# Altium PCB QC3.0 Decoy-PcbDoc.PcbDoc
Units mil, origin at the board's own origin, x right, y up, seen from the top; angles counter-clockwise.
Board outline 1901.57 x 590.55 mil, 2 copper layers (Top Layer, Bottom Layer), stack 38.57 mil thick; 42 components, 37 nets, 161 pads, 85 vias.
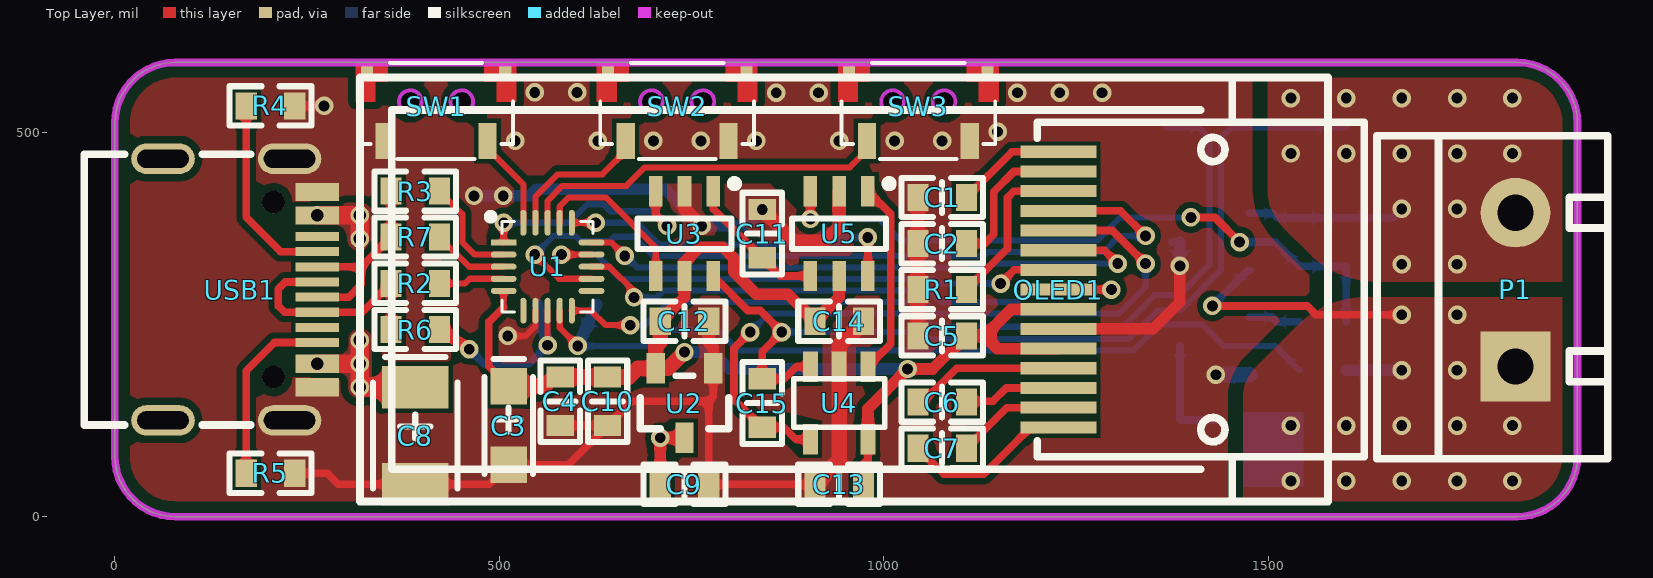
[diagram p0: Top Layer view]
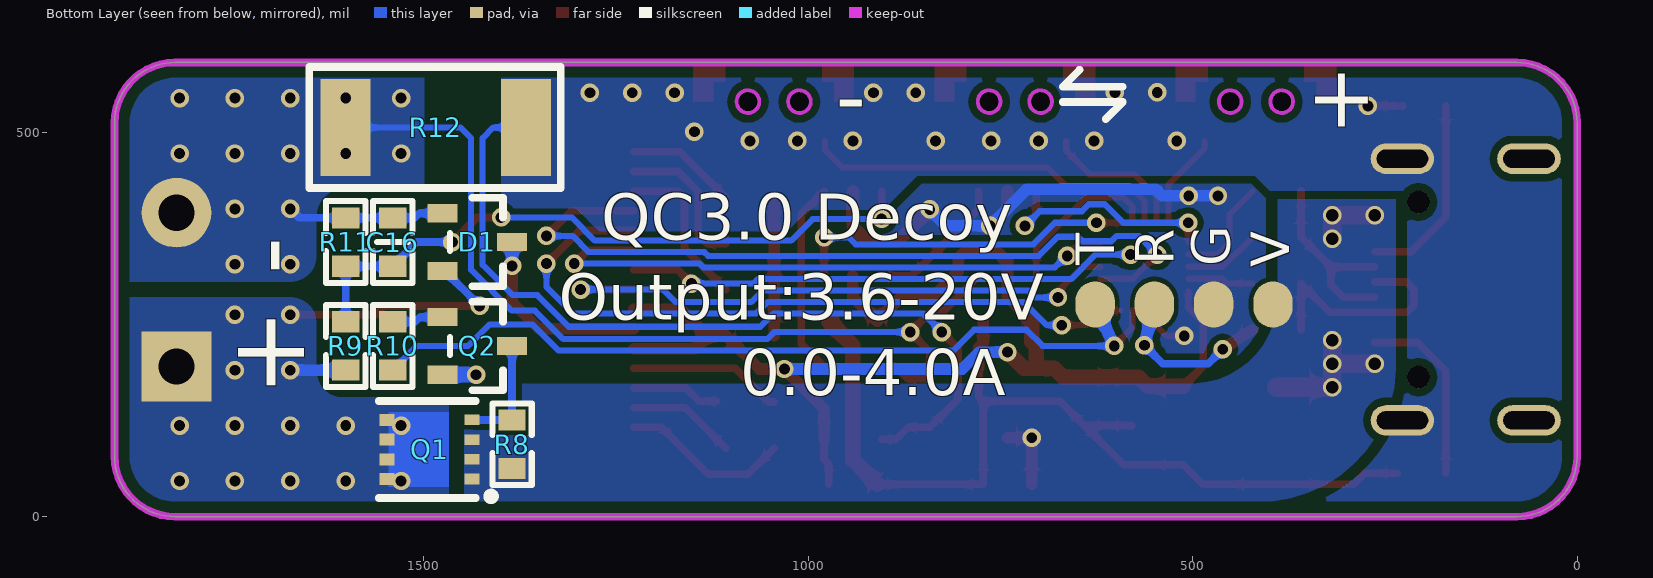
[diagram p1: Bottom Layer view, seen from below]

## Layer stack, top to bottom
Top Solder: solder mask 0.4, Solder Resist, Dk 3.5
Top Layer: signal copper 1.4
Dielectric 1: dielectric 35.7701, FR-4, Dk 4.8
Bottom Layer: signal copper 1.4
Bottom Solder: solder mask 0.4, Solder Resist, Dk 3.5

## Board outline
0,78.74 0,511.81 cw(c78.74,511.81) 78.74,590.55 1822.83,590.55 cw(c1822.83,511.81) 1901.57,511.81 1901.57,78.74 cw(c1822.83,78.74) 1822.83,0 78.74,0 cw(c78.74,78.74)

## Design rules (kind name [scope] priority, off if disabled: settings)
Clearance [All] p1: gap=10 except(6: Track-SMDPad SMDPad-SMDPad SMDPad-Via SMDPad-Poly; 7: Track-Track; 8: Track-Via Track-Poly Via-Poly Via-Region)
ComponentClearance [All] p1 off: gap=10 collisioncheckmode=3 verticalgap=10 showdistances=FALSE
PlaneConnect [All] p1: planeconnectstyle=Relief reliefexpansion=20 reliefentries=4 reliefconductorwidth=10 reliefairgap=8
PolygonConnect [All] p1: connectstyle=Direct reliefconductorwidth=10 reliefentries=4 polygonreliefangle="90 Angle" airgapwidth=10
RoutingVias [All] p1: holewidth=28 width=50 viastyle="Through Hole" minholewidth=28 minwidth=50 maxholewidth=28 maxwidth=50
SolderMaskExpansion [All] p1: expansion=4
Width [All] p1: maxlimit=90 minlimit=6 preferedwidth=10
28 further rules are at their usual default settings.

## Components (designator, comment, footprint, x,y, rotation, side; value= is the part's Value field where it differs from the comment)
C1 "1uF" C-0603-M 1075.63,415 r180 top
C2 "10uF" C-0603-M 1075.63,355 r180 top
C3 "10uF" C-钽电容-3216-N 512,118.5 r90 top
C4 "0.1uF" C-0603-M 579,150 r270 top
C5 "10uF" C-0603-M 1075.63,235 r180 top
C6 "1uF" C-0603-M 1075.63,149 r0 top
C7 "1uF" C-0603-M 1075.63,89 r180 top
C8 "10uF" C-钽电容-3528-N 390.63,105.31 r90 top
C9 "1uF" C-0603-M 740.63,42 r0 top
C10 "1uF" C-0603-M 640.63,150 r270 top
C11 "0.1uF" C-0603-M 841.63,368 r90 top
C12 "0.1uF" C-0603-M 740.63,254 r0 top
C13 "0.1uF" C-0603-M 941.69,42 r180 top
C14 "0.1uF" C-0603-M 941.69,254 r0 top
C15 "0.01uF" C-0603-M 841.63,147.76 r90 top
C16 "0.01uF" C-0603-M 1540,357 r90 bottom
D1 "PESD24VS2UT" SOT-23 1430,357 r0 bottom
OLED1 "1.09\"-128*64" "OLED-1.09-15PIN - duplicate" 885.83,295.28 r0 top
P1 "KF301-5.0-2P" KF301-5.0-2P 1820.94,395.28 r90 top
Q1 "PMOS" DFN-8_L3.0-W3.0-P0.65-BL_NCE3035Q 1492.07,87.39 r0 bottom
Q2 "NPN" SOT-23 1430,222 r0 bottom
R1 "560k" R-0603-M 1075.63,295.28 r0 top
R2 "10k,1%" R-0603-M 390.63,303.31 r180 top
R3 "10k,1%" R-0603-M 390.63,423.31 r180 top
R4 "5.1k" R-0603-M 202.36,534 r180 top
R5 "5.1k" R-0603-M 202.36,56.55 r180 top
R6 "2.2k" R-0603-M 390.63,243.31 r180 top
R7 "2.2k" R-0603-M 390.63,363.58 r180 top
R8 "47k" R-0603-M 1384.72,94.28 r90 bottom
R9 "47k" R-0603-M 1601,222 r270 bottom
R10 "2k" R-0603-M 1540,222 r90 bottom
R11 "5.1k" R-0603-M 1601,357 r270 bottom
R12 "0.01R" R-2512-L 1483,506 r0 bottom
SW1 "Button" "TSW SMD-2*4*3.5" 417.63,539.63 r0 top
SW2 "Button" "TSW SMD-2*4*3.5" 731.13,539.63 r0 top
SW3 "Button" "TSW SMD-2*4*3.5" 1044.63,539.63 r0 top
U1 "STC8H1K17" "QFN20 3X3" 562.63,325 r0 top
U2 "SGM2200-3.3YN3LG/TR" SOT-23 740.63,147.76 r90 top
U3 "MCP3425A0T-E/CH" SOT23-6L 740.63,368 r180 top
U4 "INA180A2IDBVR" SOT23-5 979.09,195 r180 top
U5 "SN74LVC1G3157DBVR" SOT23-6L 941.69,368 r180 top
USB1 "USB-C" USB-C-SMD_16P 62.63,295.28 r270 top

## Footprints (in the part's own frame and the unit in brackets; to place one, negate y for a bottom-side part, rotate by r counter-clockwise, add the part's x,y. Pads: shape width x height; smd on the part's side, far side on the other; paste and mask are expansions set on the pad)
C-0603-M [mm]
  rect 0.7x0.9 smd: 1(-0.8,0) 2(0.8,0)
  silkscreen extent -1.35,-0.65 1.35,0.65, body extent -0.8,-0.4 0.8,0.4, height 0.6
C-钽电容-3216-N [mm]
  rect 1.2x1.2 smd: 1(1.3,0) 2(-1.3,0)
  silkscreen extent -1.6,-0.8 2.2,0.8, body extent -1.6,-0.8 1.6,0.8, height 1.61
C-钽电容-3528-N [mm]
  rect 1.4x2.2 smd: 1(1.6,0) 2(-1.6,0)
  silkscreen extent -1.75,-1.4 2.6,1.4, body extent -1.75,-1.4 1.75,1.4, height 1.91
DFN-8_L3.0-W3.0-P0.65-BL_NCE3035Q [mm]
  rect 0.5x0.35 smd: 1(-1.4,-0.975) 2(-1.4,-0.325) 2(-1.4,0.325) 2(-1.4,0.975)
  rect 0.5x0.4 smd: 3(1.4,-0.975) 3(1.4,-0.325) 3(1.4,0.325) 3(1.4,0.975)
  Top Layer region: 1.35,-1.225 -0.63,-1.225 -0.63,1.225 1.35,1.225
  silkscreen extent -2.16,-1.6 1.67,1.68, body extent -1.53,-1.55 1.67,1.55, height 0.8
KF301-5.0-2P [mm] "可拼接端子/6A"
  rect 2.3x2.3 hole 1.2: 1(-5.08,0)
  round 2.3 hole 1.2: 2(0,0)
  silkscreen extent -8.13,-3.05 2.54,4.57, body extent -7.95,-3 2.55,4.6, height 10.05
"OLED-1.09-15PIN - duplicate" [mm] "128x64OLED显示屏15脚SPI接口"
  rect 2.5x0.4 smd: 1(8.659,-4.55) 2(8.659,-3.9) 3(8.659,-3.25) 4(8.659,-2.6) 5(8.659,-1.95) 6(8.659,-1.3) 7(8.659,-0.65) 8(8.659,0) 9(8.659,0.65) 10(8.659,1.3) 11(8.659,1.95) 12(8.659,2.6) 13(8.659,3.25) 14(8.659,3.9) 15(8.659,4.55)
  silkscreen extent -14.4,-7 18.76,7, body extent -14.4,-7 18.76,7, height 1.4
"QFN20 3X3" [mm]
  rect 0.85x0.2 smd: 1(-1.45,0.8)
  oval 0.85x0.2 smd: 2(-1.45,0.4) 3(-1.45,0) 4(-1.45,-0.4) 5(-1.45,-0.8) 11(1.45,-0.8) 12(1.45,-0.4) 13(1.45,0) 14(1.45,0.4) 15(1.45,0.8)
  oval 0.2x0.85 smd: 6(-0.8,-1.45) 7(-0.4,-1.45) 8(0,-1.45) 9(0.4,-1.45) 10(0.8,-1.45) 16(0.8,1.45) 17(0.4,1.45) 18(0,1.45) 19(-0.4,1.45) 20(-0.8,1.45)
  silkscreen extent -1.98,-1.5 1.5,1.75, body extent -1.5,-1.51 1.5,1.49, height 0.85
R-0603-M [mm]
  rect 0.7x0.9 smd: 1(-0.8,0) 2(0.8,0)
  silkscreen extent -1.35,-0.65 1.35,0.65, body extent -0.8,-0.4 0.8,0.4, height 0.38
R-2512-L [mm] "1W贴片电阻"
  rect 1.65x3.2 smd: 1(-2.953,0) 2(2.997,0)
  silkscreen extent -4.1,-2 4.2,2, body extent -3.2,-1.6 3.2,1.6, height 0.55
SOT23-5 [mm]
  rect 0.5x1 smd: 1(0,0) 2(0.95,0) 3(1.9,0) 4(1.9,2.4) 5(0,2.4)
  silkscreen extent -0.55,0.4 2.45,2, body extent -0.5,-0.2 2.4,2.6, height 1.09
SOT23-6L [mm] "3x1.6x1.1mm(长宽高) 封装库来自淘宝卖家 ID：黄晶宝石"
  rect 0.45x1 smd: 1(-0.95,-1.397) 2(0,-1.397) 3(0.95,-1.397) 4(0.95,1.397) 5(0,1.397) 6(-0.95,1.397)
  silkscreen extent -1.78,-1.78 1.55,0.51, body extent -1.5,-1.4 1.5,1.4, height 1.15
SOT-23 [mm]
  rect 1x0.6 smd: 1(1.15,-0.95) 2(1.15,0.95) 3(-1.15,0)
  silkscreen extent -0.85,-1.46 0.9,1.46, body extent -1.5,-1.5 1.5,1.5, height 1.3
"TSW SMD-2*4*3.5" [mm] "贴片侧贴轻触开关"
  rect 0.4x0.4 smd: 0(-2.286,1) 0(2.286,1)
  rect 0.6x1.2 smd: 1(-1.7,-1.3) 2(1.7,-1.3)
  Top Layer region: 2.65,0 2.65,1.3 1.6,1.3 1.6,0.65 2,0.65 2,0
  Top Layer region: -2.65,0 -2.65,1.3 -1.6,1.3 -1.6,0.65 -2,0.65 -2,0
  Keep-Out Layer board cut-out: 0.475,0 0.504,-0.144 0.585,-0.265 0.706,-0.346 0.85,-0.375 0.85,-0.375 0.994,-0.346 1.115,-0.265 1.196,-0.144 1.225,0 1.225,0 1.196,0.144 1.115,0.265 0.994,0.346 0.85,0.375 0.85,0.375 0.706,0.346 0.585,0.265 0.504,0.144 0.475,0
  Keep-Out Layer board cut-out: -0.85,-0.375 -0.994,-0.346 -1.115,-0.265 -1.196,-0.144 -1.225,0 -1.225,0 -1.196,0.144 -1.115,0.265 -0.994,0.346 -0.85,0.375 -0.85,0.375 -0.706,0.346 -0.585,0.265 -0.504,0.144 -0.475,0 -0.475,0 -0.504,-0.144 -0.585,-0.265 -0.706,-0.346 -0.85,-0.375
  Keep-Out Layer circle w0.127: c-0.85,0 r0.375
  Keep-Out Layer circle w0.127: c0.85,0 r0.375
  silkscreen extent -2.54,-1.9 2.54,1.27, body extent -2.27,-1.66 2.27,2.13, height 1.8
USB-C-SMD_16P [mm]
  oval 1x2.1 hole 0.6 slot 1.7 at 90 deg: 0(-4.32,4.18) 0(-4.32,0) 0(4.32,4.18) 0(4.32,0)
  rect 0.6x1.45 smd: A1B12(-3.225,5.095) A4B9(-2.45,5.095) B1A12(3.225,5.095) B4A9(2.45,5.095)
  rect 0.3x1.45 smd: A5(-1.25,5.095) A6(-0.25,5.095) A7(0.25,5.095) A8(-1.75,5.095) B5(1.75,5.095) B6(0.75,5.095) B7(-0.75,5.095) B8(1.25,5.095)
  round 0.75 hole 0.75 unplated: ""(-2.89,3.65) ""(2.89,3.65)
  silkscreen extent -4.47,-2.6 4.47,2.9, body extent -4.47,-2.66 4.47,5.24, height 3.25

## Part data
C1 C2 C4 C5 C6 C7 C9 C10 C11 C12 C13 C14 C15 C16: library part Cap, "无极性电容"
C3 C8: library part Cap_1, "有极性电容"
D1: "Two-line ESD protection,24v"
OLED1: library part OLED-1.09-SPI, "OLED12864屏幕"
Q1: "P沟道场效应管"
Q2: "NPN型三极管"
R1 R2 R3 R4 R5 R6 R7 R8 R9 R10 R11 R12: library part Resistor, "电阻"
SW1 SW2 SW3: "轻触开关"
U1: library part STC8H1K17-QFN20, "增强型51单片机"
U2: "高输入电压LDO，Vin <= 26v, Vout = 3.3v"
U3: "16位单通道差分输入ADC"
U4: "低侧和高侧电压输出电流感应放大器，增益=50"
U5: "双向导通，导通电阻6Ω，单刀双掷模拟开关"
USB1: library part USB-C-SMD_16P, "USB-C型母接口"

## Free pads (board coordinates)
  oval 51.18x60 smd far side: 6(395.52,276) 6(472.59,276) 6(549.67,276) 6(626.74,276)

## Via types
v1: diameter 24, hole 14, Top Layer to Bottom Layer, tented both sides, 71 vias
v2: diameter 24, hole 14, Top Layer to Bottom Layer, tented top, 6 vias
v3: diameter 24, hole 16, Top Layer to Bottom Layer, tented both sides, 5 vias
v4: diameter 24, hole 16, Top Layer to Bottom Layer, tented bottom, 2 vias
v5: diameter 24, hole 14, Top Layer to Bottom Layer, tented bottom, 1 vias

## Nets (pads, with @x,y where several pads share a name; then routed paths per layer and width w, separated by ;. In a path a pad name is that pad's centre, name@x,y a point inside that pad or via, vN(x,y) a via of type N, cw(c..) or ccw(c..) an arc to the next point about the centre after c; other vN are vias at no path point)
3V3: C3.1 C4.1 C5.1 C10.1 C12.1 C13.1 C14.1 OLED1.5 OLED1.7 U1.5 U2.2 U3.5 U4.5 U5.5 | length 1646.8
  Top Layer w8: 505.54,272.54 U1.5
  Top Layer w10: 505.54,272.54 486,253 486,195.69 C3.1 ; C13.1 973.19,68.56 979.09,74.46 U4.5 ; C5.1@1106.09,235 C5.1
  Top Layer w15: C12.1 740.63,285.5 U3.5 740.63,331 759.63,350 790.63,350 804.63,336 804.63,318.37 834,289 875.2,289 C14.1 941.69,285.5 U5.5 ; U4.5 979.09,140.46 v1(1030.63,192) 1063.09,192 C5.1@1106.09,235 ; C5.1 1130.63,235 ; OLED1.5 1147.13,218.5 1130.63,235 ; OLED1.7 1165.31,269.68 1130.63,235
  Top Layer w20: C3.1 558.43,169.69 570.24,181.5 C4.1 C10.1 668.5,181.5 680.03,193.03 U2.2 ; C12.1 709.13,227.5 703.23,221.6 U2.2 ; v1(740.63,214) 719.66,193.03 U2.2
  Bottom Layer w15: v1(740.63,214) 777.63,214 799.63,192 v1(1030.63,192)
ADC: C11.1 U3.1 U5.4 | length 185.2
  Top Layer w10: U3.1 778.03,400.1 C11.1 865.13,313 U5.4
C\S\: OLED1.8 U1.13 | length 782.8
  Top Layer w8: U1.13 643.06,325 675,293.06 v1(675,285)
  Top Layer w10: OLED1.8 v1(1295.63,295.27)
  Bottom Layer w8: v1(675,285) 704.42,285 713.42,294 1059,294 1074,279 1172,279 1188.27,295.27 v1(1295.63,295.27)
CC1: R4.2 USB1.A5 | length 255.7
  Top Layer w10: R4.2 170.86,389.14 215.49,344.51 USB1.A5
CC2: R5.2 USB1.B5 | length 240.8
  Top Layer w10: R5.2 170.86,189.86 207.4,226.4 USB1.B5
D+: R2.2 R6.2 USB1.A6 USB1.B6 | length 301.8
  Top Layer w10: USB1.A6 221.77,305.14 212.63,296 212.63,274 220.86,265.77 USB1.B6 321.59,265.77 R2.2 R6.2
D+PD: pad.6@549.67,276 R6.1 U1.8 | length 265.4
  Top Layer w8: v1(562.63,223) U1.8
  Top Layer w15: R6.1 v1(460.71,217.82)
  Bottom Layer w10: v1(460.71,217.82) 479.52,199 538.63,199 v1(562.63,223)
  Bottom Layer w15: pad.6@549.67,276 v1(562.63,223)
D+PU: R2.1 U1.4 | length 85.9
  Top Layer w8: R2.1 455.31,303.31 461.25,309.25 U1.4
D-: R3.2 R7.2 USB1.A7 USB1.B7 | length 258.6
  Top Layer w10: USB1.A7 303.93,285.43 320.35,301.86 320.35,324.8 ; USB1.B7 320.35,324.8 ; R3.2 R7.2 320.35,324.8
D-PD: R7.1 U1.3 | length 99.4
  Top Layer w8: R7.1 460.71,325 U1.3
D-PU: R3.1 U1.2 | length 139.1
  Top Layer w8: R3.1 452,393.43 452,356.76 468.01,340.75 U1.2
D/C\: OLED1.10 U1.15 | length 784.3
  Top Layer w8: U1.15 645.5,356.5 v1(663,339)
  Top Layer w10: OLED1.10 1286.55,346.45 v1(1304,329)
  Bottom Layer w8: v1(663,339) 664,339 679,324 1136,324 1141,329 v1(1304,329)
I+V-: C15.2 C16.2 D1.1 P1.2 R11.1 R12.2 U3.6 U4.3 | length 1416.5
  Top Layer w10: U3.6 823.03,268 839,268 v1(867,240) 841.63,214.63 C15.2 870.25,179.25 886,195 U4.3
  Bottom Layer w8: v1(867,240) 1044,240 1053,231 1318,231 1355,268 1385,268 1438,321 1438,492 1452,506 R12.2
  Bottom Layer w10: D1.1 1505.6,394.4 1511.5,388.5 C16.2 R11.1 1661.34,388.5 v1(1673,400.15)
  other v1: 1673,328.15 1745,328.15 1745,400.15 1673,472.15 1745,472.15 1817,472.15 1673,544.15 1745,544.15 1817,544.15
  other v2: 1529,472.15 1601,472.15 1529,544.15 1601,544.15
I-: C1.2 C2.2 C3.2 C4.2 C5.2 C8.2 C9.2 C10.2 C11.2 C12.2 C13.2 C14.2 C15.1 D1.3 OLED1.6 pad.6@472.59,276 Q2.2 R1.1 R4.1 R5.1 R12.1 SW1.1 SW2.2 SW3.2 U1.7 U2.1 U3.2 U4.2 U4.4 U5.2 USB1.0@227.2,125.2 USB1.0@227.2,465.35 USB1.A1B12 USB1.B1A12 | length 3553.2
  Top Layer w8: v1(511,235) 533.99,235 546.88,247.89 U1.7
  Top Layer w10: R5.1 276.45,56.55 290.68,42.32 C8.2 487,42.32 C3.2 589.45,67.32 C10.2 ; R4.1 v1(272,534) ; C4.2 C10.2 ; U2.1 778.03,155.91 772.13,150 ; v1(826,240) 805,219 805,152.89 C15.1 869.74,116.26 885.49,100.51 U4.4 ; C13.2 C9.2 772.13,150 ; C2.2@1042.13,357 C2.2 ; C10.2 672.13,150 772.13,150
  Top Layer w15: C12.2 772.13,225.87 778.03,219.97 U2.1 ; C5.2 R1.1 C2.2 C1.2 ; OLED1.6 1349.8,244.09 1384.72,279.01 v1(1384.72,326)
  Top Layer w17: U3.2 740.63,400.37 v1(763,378) ; v5(841.63,399.5) 882.63,358.5 923.5,358.5 941.69,376.69 U5.2
  Top Layer w20: C13.2 941.69,73.5 U4.2 941.69,222.5 C14.2
  Bottom Layer w8: v1(826,240) 850,264 1045,264 1062,247 1311,247 1352,288 1383.79,288 1423,327.21 1423,492 1409,506 R12.1
  Bottom Layer w10: D1.3@1374,357 D1.3
  Bottom Layer w15: v1(467,417) v1(505,417) 539.26,417 547.76,425.5 715.5,425.5 v1(763,378) 820.13,378 v5(841.63,399.5) ; v1(1384.72,326) D1.3
  Bottom Layer w20: v1(1431.6,184.6) Q2.2
  other v1: 520.62,488.45 628.14,488.45 700.26,488.45 762,488.45 834.12,488.45 941.64,488.45 1013.76,488.45 1075.5,488.45 1147.62,500.45 860,551 915,551 1173.5,551 1228.5,551 1283.5,551 545.94,551.55 600.94,551.55
IOUT: U4.1 U5.1 | length 252.5
  Top Layer w10: U4.1 1008.63,224.54 1008.63,393.46 U5.1
KEY1: SW1.2 U1.20 | length 125.7
  Top Layer w8: SW1.2 484.56,478.44 531.13,431.87 U1.20
KEY2: SW2.1 U1.19 | length 188.8
  Top Layer w8: U1.19 546.88,416.09 575.79,445 633.62,445 664.2,475.58 SW2.1
KEY3: SW3.1 U1.18 | length 483.1
  Top Layer w8: U1.18 562.63,410.63 582,430 665,430 689,454 955.59,454 977.7,476.11 SW3.1
MOSI: OLED1.12 U1.12 | length 1043.9
  Top Layer w8: v1(546,340.75) 577.5,309.25 U1.12
  Top Layer w10: OLED1.12 1307.37,397.63 v1(1340,365)
  Bottom Layer w8: v1(546,340.75) 570,364.75 598.94,364.75 605.69,358 643,358 649,364 675,364 700,339 1129.79,339 1134.79,344 1285,344 1306,365 v1(1340,365)
NetC1_1: C1.1 OLED1.15 | length 144.2
  Top Layer w10: C1.1 1166.53,474.4 OLED1.15
NetC2_1: C2.1 OLED1.14 | length 198.2
  Top Layer w10: C2.1@1107.13,362.29 C2.1 1130.63,355 1142.63,367 1142.63,422.46 1168.99,448.81 OLED1.14
NetC6_1: C6.1 OLED1.4 | length 200.8
  Top Layer w10: C6.1 1050.63,149 1094.54,192.91 OLED1.4
NetC6_2: C6.2 OLED1.3 | length 115.3
  Top Layer w10: C6.2@1118.63,150 1141.63,150 1158.94,167.32 OLED1.3
NetC7_1: C7.1 OLED1.2 | length 141.5
  Top Layer w10: C7.1 1159.85,141.72 OLED1.2
NetC7_2: C7.2 OLED1.1 | length 222
  Top Layer w10: C7.2 1078.13,55 1129.63,55 1190.76,116.13 OLED1.1
NetD1_2: D1.2 P1.1 Q1.3 R9.2 | length 390
  Top Layer w10: v1(1427,274) 1550,274 1561.6,262.4 v1(1673,262.4)
  Bottom Layer w10: v1(1427,274) 1472.6,319.6 D1.2 ; v1@1672.9,190.5 v1(1673,190.4)
  Bottom Layer w15: R9.2 v1@1672.9,190.5
  other v1: 1601,46.4 1673,46.4 1745,46.4 1817,46.4 1601,118.4 1673,118.4 1745,118.4 1817,118.4 1745,190.4 1745,262.4
  other v2: 1529,46.4 1529,118.4
NetOLED1_13: OLED1.13 R1.2 | length 211.4
  Top Layer w10: R1.2 1160.63,348.78 1160.63,415 1168.85,423.22 OLED1.13
NetQ1_1: Q1.1 Q2.3 R8.2 | length 145.5
  Bottom Layer w10: Q2.3 R8.2 Q1.1@1434,125.77
NetQ2_1: Q2.1 R10.2 | length 67.2
  Bottom Layer w10: Q2.1 1504.6,259.4 1510.5,253.5 R10.2
PT: pad.6@626.74,276 R10.1 U1.9 | length 1111.7
  Top Layer w8: U1.9 578.38,245.62 v1(602,222)
  Bottom Layer w8: v1(602,222) 695,222 716,243 784,243 811,216 1324.21,216 1358.21,250 1414,250 1442,222 1508.5,222 R10.1
  Bottom Layer w15: v1(602,222) pad.6@626.74,276
R\E\S\: OLED1.9 U1.14 | length 708.2
  Top Layer w8: v1(580.63,340.75) U1.14
  Top Layer w10: v1(1151.63,303) 1169.49,320.86 OLED1.9
  Bottom Layer w8: v1(580.63,340.75) 626.25,340.75 658,309 1065.21,309 1071.21,303 v1(1151.63,303)
SCL: U1.1 U3.3 | length 310.5
  Top Layer w8: U1.1@505.54,356.75 v1(505.54,382.09)
  Top Layer w10: U3.3 703.23,392.77 v1(718,378)
  Bottom Layer w8: v1(505.54,382.09) 590.28,382.09 614.28,406.09 634.94,406.09 643.94,397.09 698.91,397.09 v1(718,378)
SCLK: OLED1.11 U1.10 | length 947.9
  Top Layer w8: U1.10 619.09,267.91 638,249 v1(670,249)
  Top Layer w10: OLED1.11 1296.96,372.04 v1(1340,329)
  Bottom Layer w8: v1(670,249) 689.63,249 719.63,279 1052.79,279 1067.79,264 1305,264 1340,299 v1(1340,329)
SDA: U1.17 U3.4 | length 214.7
  Top Layer w8: U1.17 578.38,403.38 590,415 638,415 703.23,349.77 U3.4
SW: U1.16 U5.6 | length 450
  Top Layer w8: U1.16@594.38,382.09 v1(625,382.09)
  Top Layer w10: v1(979,363) 979.09,362.91 U5.6
  Bottom Layer w8: v1(625,382.09) 679.13,382.09 707.21,354 938,354 947,363 v1(979,363)
V+: C16.1 R9.1 R11.2 U5.3 | length 855
  Top Layer w10: v1(904.29,387) U5.3 ; v1(1399,389) 1430.28,389 v1(1462.28,357)
  Bottom Layer w8: v1(904.29,387) 994,387 1022,359 1277,359 1307,389 v1(1399,389)
  Bottom Layer w10: v1(1462.28,357) 1508.5,357 C16.1 R11.2 R9.1
VCC: C8.1 C9.1 pad.6@395.52,276 Q1.2 R8.1 U2.3 USB1.A4B9 USB1.B4A9 | length 366.3
  Top Layer w15: C9.1 v1(709.13,102.48) U2.3
  Top Layer w24: v4(263.22,198.82) v3(318.63,198.82) ; v4(263.22,391.73) v3(318.63,391.73) v3(318.63,361.22) ; v3(318.63,168.3) v3(318.63,198.82) ; v3(318.63,229.33) v3(318.63,198.82)
  Top Layer w25: v3(318.63,168.3) C8.1
pads on no net: SW1.0 SW2.0 SW3.0 U1.6 U1.11 USB1. USB1.0@62.63,125.2 USB1.0@62.63,465.35 USB1.A8 USB1.B8

## Polygon pours and split planes (outlines as drawn)
NetD1_2 on Top Layer "Top Layer-No Net" (solid, remove dead copper, pour order 117): 1467,20 1467,155 cw(c1522.53,155) 1483.26,194.26 1538.64,249.64 cw(c1624,164.29) 1624,285 1881.57,285 1881.57,78.74 cw(c1822.83,78.74) 1822.83,20
I+V- on Top Layer "Top Layer-No Net" (solid, remove dead copper, pour order 119): 1519.9,375.1 cw(c1570.35,425.55) 1499,425.55 1499,570.55 1822.83,570.55 cw(c1822.83,511.81) 1881.57,511.81 1881.57,305.55 1639.45,305.55 cw(c1639.45,426.26) 1554.09,340.91
I- on Top Layer "Top Layer-No Net" (solid, remove dead copper, pour order 134): 995,20 995,190.26 1023,218.26 1023,397.25 976.25,444 857,444 529,444 484,489 484,570.55 1479,570.55 1479,425.55 ccw(c1570,425.55) 1505.65,361.21 1553,313.86 1553,292.07 1468.97,208.03 ccw(c1521,155) 1446.7,155 1447,20
VCC on Top Layer "Top Layer-No Net" (solid, remove dead copper, pour order 136): 269,210.84 291.84,210.84 ccw(c291.84,223) 304,223 304,230 cw(c318,230) 318,244 319.97,244 cw(c319.97,230) 333.97,230 333.97,168.41 cw(c319,168.41) 319,153.44 318.37,153.44 cw(c318.37,168.46) 303.36,168.46 303.36,176.17 ccw(c292.53,176.17) 292.53,187 269,187
VCC on Top Layer "Top Layer-No Net" (solid, remove dead copper, pour order 138): 270,380 285.58,380 cw(c285.58,363.58) 302,363.58 302,361.98 ccw(c318.98,361.98) 318.98,345 320,345 ccw(c320,360) 335,360 335,391.98 ccw(c318.98,391.98) 318.98,408 301.83,408 ccw(c301.83,401.17) 297,406 cw(c290.67,412.33) 290.67,403.38 270,403.38
I- on Top Layer "Top Layer-No Net" (solid, remove dead copper, pour order 140): 20,78.74 20,511.81 cw(c78.74,511.81) 78.74,570.55 484,570.55 484,489 540,433 852,433 909,376 989,376 1008.23,356.77 1008.23,225 979,195.77 979,20 78.74,20 cw(c78.74,78.74)
NetD1_2 on Bottom Layer "Top Layer-No Net" (solid, remove dead copper, pour order 110): 1467,20 1467,155 1605,155 ccw(c1605,189) 1639,189 1639,251 cw(c1673,251) 1673,285 1881.57,285 1881.57,78.74 cw(c1822.83,78.74) 1822.83,20
I+V- on Bottom Layer "Top Layer-No Net" (solid, remove dead copper, pour order 111): 1499,425.55 1605,425.55 cw(c1605,391.55) 1639,391.55 1639,339.55 ccw(c1673,339.55) 1673,305.55 1881.57,305.55 1881.57,511.81 ccw(c1822.83,511.81) 1822.83,570.55 1499,570.55
VCC on Bottom Layer "Top Layer-No Net" (solid, remove dead copper, pour order 104): 406.67,20 cw(c412.65,196.43) 236.22,202.41 236.22,413 389.22,413 389.22,285.81 ccw(c502.03,285.81) 502.03,173 1447,173 1447,20
I- on Bottom Layer "Top Layer-No Net" (solid, remove dead copper, pour order 128): 405.19,285.81 ccw(c502,285.81) 502,189 909,189 909,376 852,433 424,433 405.19,414.19
I- on Bottom Layer "Top Layer-No Net" (solid, remove dead copper, pour order 124): 78.74,20 cw(c78.74,78.74) 20,78.74 20,511.81 cw(c78.74,511.81) 78.74,570.55 1399,570.55 1399,394 1307,394 1276,363 1023,363 994,392 909,392 858,443 419.21,443 399.8,423.59 221,423.59 221,196.43 ccw(c412.65,196.43) 337.77,20.01

## Keep-outs
Keep-Out Layer:
  the board outline again, w10

## Other copper
Top Layer:
  pour cut-out: 834,255 841.63,247.37 841.63,230.63 816,205 816,160.91 838.91,138 866.09,138 920,124.8 920,77.89 918.1,76 890,76 871.32,94.68 816,94.68 816,122 793,145 793,233.64 814.36,255
  pour cut-out: 1177,255.8 1281.95,255.8 1281.95,231 1177,231
Bottom Layer:
  pour cut-out: 1398.99,585 1489,585 1489,423.43 1398.99,423.43
  pour cut-out: 803,238.48 818.35,223.14 839.1,223.14 865.96,250 916,250 916,279 823.5,279 803,258.5

## Silkscreen, mask and mechanical layers (free items; w line width, h text height)
Bottom Overlay:
  lines w10: 590.95,559 668.95,559 646.95,581 ; 612.95,517 590.95,539 668.95,539
  text "+" at 352,507 h80
  text "-" at 964,507 h80
  text "QC3.0 Decoy" at 1269,360 h60
  text "R" at 524.67,326.57 h50 r270
  text "T" at 601.75,326.57 h50 r270
  text "G" at 451.17,325.38 h50 r270
  text "V" at 374.1,324.19 h50 r270
  text "Output:3.6-20V" at 1324,256 h60
  text "0.0-4.0A" at 1088,158 h60
  text "+ -" at 1655,156 h100 r270
Bottom Paste:
  lines w70: 315,478 1125.17,478 1147.62,500.45 1274,500.45 ; 318.63,374 318.63,214.37 318.63,183.37 415,87 1309,87
Bottom Solder:
  lines w70: 315,478 1125.17,478 1147.62,500.45 1274,500.45 ; 318.63,374 318.63,214.37 318.63,183.37 415,87 1309,87
Mechanical 1:
  lines w10: 1215.19,170.56 1215.63,171 ; 0,78.74 ccw(c78.74,78.74) 78.74,0 1822.83,0 ccw(c1822.83,78.74) 1901.57,78.74 1901.57,511.81 ccw(c1822.83,511.81) 1822.83,590.55 78.74,590.55 ccw(c78.74,511.81) 0,511.81 0,78.74